# EAGLE board PCB_Bspd_NF (EAGLE 9.6.2)
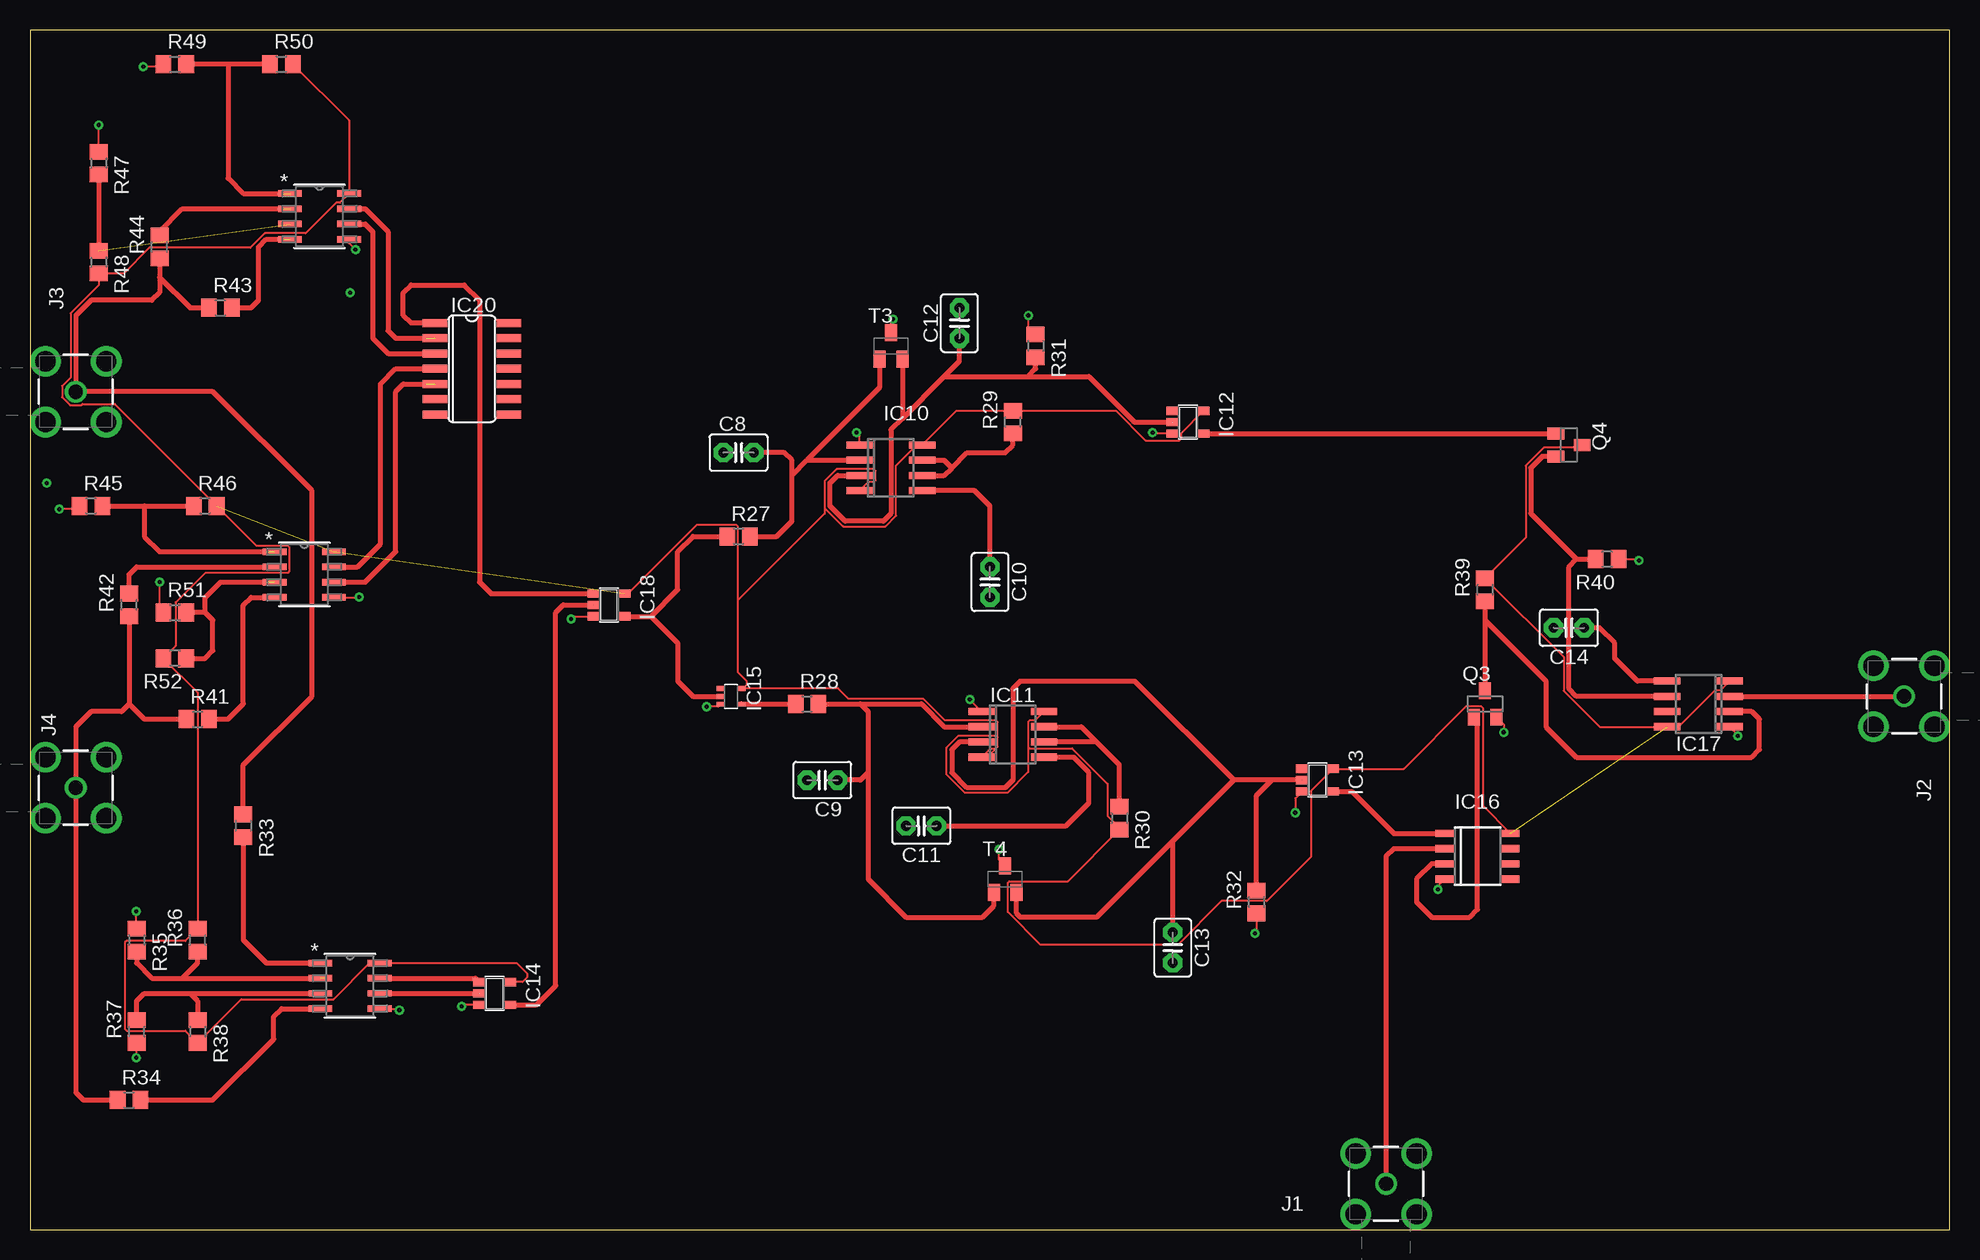
[diagram p0: board, top side]
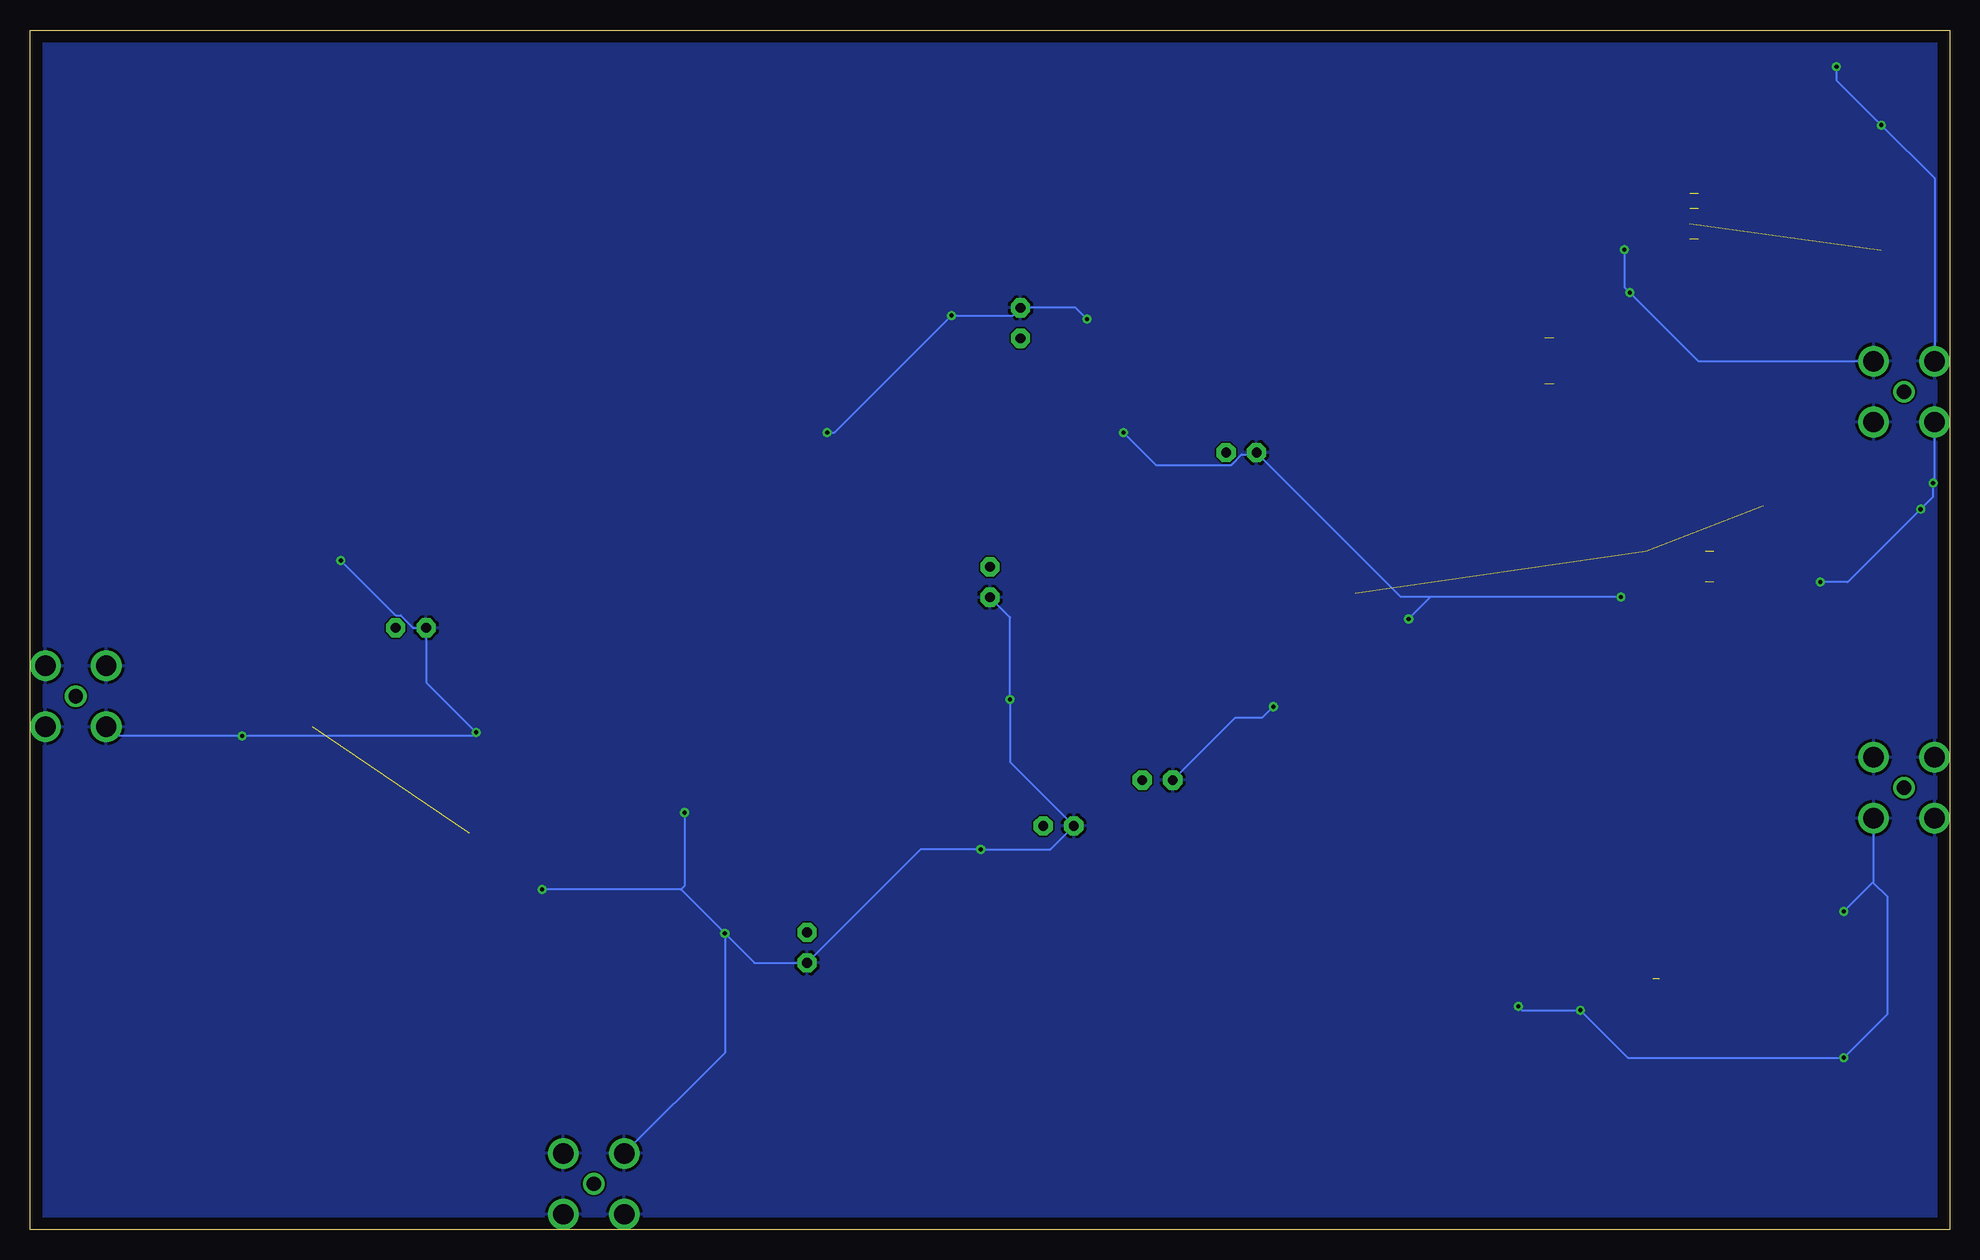
[diagram p1: board, bottom side, seen from below]

Size 160 x 100 mm. Coordinates in mm from the lower left corner, seen from the top.
Outline: 0,0 160,0 160,100 0,100 0,0
Copper layers (1*16): Top 0.035mm / dielectric 1.5mm / Bottom 0.035mm
Design rules "default": minimum track width 6mil, minimum drill 0.35mm, track to track 6mil, track to pad 6mil, pad to pad 6mil, via to via 6mil, smd to smd 6mil, copper to edge 40mil, drill to drill 6mil, minimum pad ring 10mil, minimum via ring 8mil, stop-mask expansion 4mil, vias tented up to drill 0mil, thermal gap 10mil

## Footprints (pad centres in the part's own frame; a part is rotated, then mirrored left to right if it is on the bottom)
C2.5-3 = drill 0.813 pad 1.6 octagon: 1 -1.27,0; 2 1.27,0
SO08 = smd 0.6 x 2.2: 1 -1.905,-2.6; 2 -0.635,-2.6; 3 0.635,-2.6; 4 1.905,-2.6; 5 1.905,2.6; 6 0.635,2.6; 7 -0.635,2.6; 8 -1.905,2.6
SOT23-5 = smd 0.69 x 0.99: 1 -0.95,-1.29; 2 0,-1.29; 3 0.95,-1.29; 4 0.95,1.3; 5 -0.95,1.3
SC70-5 = smd 0.4 x 0.7: 1 -0.65,-0.85; 2 0,-0.85; 3 0.65,-0.85; 4 0.65,0.85; 5 -0.65,0.85
D_R-PDSO-G8 = smd 0.6 x 1.5: 1 -1.905,-2.75; 2 -0.635,-2.75; 3 0.635,-2.75; 4 1.905,-2.75; 5 1.905,2.75; 6 0.635,2.75; 7 -0.635,2.75; 8 -1.905,2.75
SO14 = smd 0.66 x 2.032: 1 -3.81,-3.073; 2 -2.54,-3.073; 3 -1.27,-3.073; 4 0,-3.073; 5 1.27,-3.073; 6 2.54,-3.073; 7 3.81,-3.073; 8 3.81,3.073; 9 2.54,3.073; 10 1.27,3.073; 11 0,3.073; 12 -1.27,3.073; 13 -2.54,3.073; 14 -3.81,3.073
60613003121501 = drill 1.2: 1 0,0 | drill 1.7: 2 -2.54,2.54; 3 2.54,2.54; 4 2.54,-2.54; 5 -2.54,-2.54
SOT23 = smd 1 x 1.4: 1 -0.95,-1.1; 2 0.95,-1.1; 3 0,1.1
R0805 = smd 1.3 x 1.5: 1 -0.95,0; 2 0.95,0
SOT23-BEC = smd 1 x 1.4: B -0.95,-1.1; C 0,1.1; E 0.95,-1.1
SO-8_S = smd 1.981 x 0.533: 1 -2.464,1.905; 2 -2.464,0.635; 3 -2.464,-0.635; 4 -2.464,-1.905; 5 2.464,-1.905; 6 2.464,-0.635; 7 2.464,0.635; 8 2.464,1.905

## Placement (x,y rotation side)
C8  [C2.5-3]  59.05,64.77 0 top
C9  [C2.5-3]  66.04,37.47 180 top
C10  [C2.5-3]  80.01,53.98 270 top
C11  [C2.5-3]  74.3,33.66 180 top
C12  [C2.5-3]  77.47,75.56 90 top
C13  [C2.5-3]  95.25,23.5 270 top
C14  [C2.5-3]  128.27,50.16 180 top
IC10  NE555D  [SO08]  71.75,63.5 270 top
IC11  NE555D  [SO08]  81.92,41.27 270 top
IC12  74AUC1G06DBV  [SOT23-5]  96.52,67.31 270 top
IC13  74AUC1G06DBV  [SOT23-5]  107.31,37.47 270 top
IC14  74AHC1G08DBV  [SOT23-5]  38.73,19.68 270 top
IC15  74AHC1G04DCK  [SC70-5]  58.42,44.45 270 top
IC16  SN75453BD  [D_R-PDSO-G8]  120.65,31.11 270 top
IC17  NE555D  [SO08]  139.06,43.81 90 top
IC18  74AHC1G32DBV  [SOT23-5]  48.26,52.07 270 top
IC20  4072D  [SO14]  36.83,71.75 270 top
J1  60613003121501  [60613003121501]  113.03,3.81 180 top
J2  60613003121501  [60613003121501]  156.21,44.45 270 top
J3  60613003121501  [60613003121501]  3.81,69.85 90 top
J4  60613003121501  [60613003121501]  3.81,36.83 90 top
Q3  BSS123  [SOT23]  121.28,43.81 0 top
Q4  BSS123  [SOT23]  128.27,65.41 270 top
R27  [R0805]  59.05,57.78 0 top
R28  [R0805]  64.77,43.81 0 top
R29  [R0805]  81.92,67.31 90 top
R30  [R0805]  90.81,34.29 270 top
R31  [R0805]  83.82,73.66 270 top
R32  [R0805]  102.23,27.3 90 top
R33  [R0805]  17.78,33.66 270 top
R34  [R0805]  8.26,10.79 0 top
R35  [R0805]  8.89,24.13 270 top
R36  [R0805]  13.97,24.13 90 top
R37  [R0805]  8.89,16.51 90 top
R38  [R0805]  13.97,16.51 270 top
R39  [R0805]  121.28,53.34 90 top
R40  [R0805]  131.44,55.88 180 top
R41  [R0805]  13.97,42.55 0 top
R42  [R0805]  8.26,52.07 90 top
R43  [R0805]  15.88,76.83 0 top
R44  [R0805]  10.79,81.92 90 top
R45  [R0805]  5.08,60.33 0 top
R46  [R0805]  14.61,60.33 0 top
R47  [R0805]  5.71,88.9 270 top
R48  [R0805]  5.71,80.64 270 top
R49  [R0805]  12.06,97.16 0 top
R50  [R0805]  20.95,97.16 0 top
R51  [R0805]  12.06,51.44 0 top
R52  [R0805]  12.06,47.62 180 top
T3  [SOT23-BEC]  71.75,73.66 0 top
T4  [SOT23-BEC]  81.28,29.21 0 top
U4  LT1720CS8#PBF  [SO-8_S]  26.67,20.32 0 top
U5  LT1720CS8#PBF  [SO-8_S]  22.86,54.61 0 top
U6  LT1720CS8#PBF  [SO-8_S]  24.13,84.45 0 top

## Library data of the parts
C8-C14 = capacitor-wima
IC10 IC11 IC17 = linear
IC12-IC15 = 74xx-little-de
IC16 = texas-sn55-sn75
IC18 = 74xx-little-us
IC20 = 40xx
J1-J4 = 60613003121501; AVAILABILITY: In Stock; CHECK_PRICES: https://www.snapeda.com/parts/60613003121501/Wurth+Elektronik/view-part/?ref=eda; DESCRIPTION: Right Angle_Solder Length 3.94mm; MF: Wurth Elektronik; MP: 60613003121501; PACKAGE: None; PRICE: None; SNAPEDA_LINK: https://www.snapeda.com/parts/60613003121501/Wurth+Elektronik/view-part/?ref=snap
Q3 Q4 = transistor-small-signal
R27-R52 = rcl; SPICEPREFIX: R
T3 T4 = transistor
U4-U6 = LT1720CS8_PBF; AVAILABILITY: In Stock; CHECK_PRICES: https://www.snapeda.com/parts/LT1720CS8%23PBF/Analog+Devices/view-part/?ref=eda; DESCRIPTION: LT1720 - Dual, 4.5ns, Single Supply 3V/5V Comparators with Rail-to-Rail Outputs; MF: Analog Devices; MP: LT1720CS8#PBF; PACKAGE: SO-8 Linear Technology; PRICE: None; SNAPEDA_LINK: https://www.snapeda.com/parts/LT1720CS8%23PBF/Analog+Devices/view-part/?ref=snap

## Nets
GND: C8.1 C9.2 C10.2 C11.2 C12.2 C13.2 C14.2 IC10.1 IC11.1 IC12.3 IC13.3 IC14.3 IC15.3 IC16.4 IC17.1 IC18.3 J1.2 J1.3 J1.4 J1.5 J2.2 J2.3 J2.4 J2.5 J3.2 J3.3 J3.4 J3.5 J4.2 J4.3 J4.4 J4.5 Q3.2 R31.1 R32.1 R35.1 R37.1 R40.1 R45.1 R47.1 R49.1 R51.1 T3.C T4.C U4.5 U5.5 U6.5
N$41: IC13.4 IC16.1
N$42: IC16.3 Q3.1
N$43: C10.1 IC10.5
N$44: C11.1 IC11.5
N$45: IC10.6 IC10.7 R29.1
N$46: IC11.6 IC11.7 R30.1
N$47: C12.1 IC10.3 IC12.2 R31.2 T3.E
N$48: C13.1 IC11.3 IC13.2 R32.2 T4.E
N$49: R34.2 U4.4
N$50: R37.2 R38.1 U4.3
N$51: R35.2 R36.1 U4.2
N$52: R33.2 U4.1
N$53: IC20.2 U6.7
N$54: IC20.3 U6.6
N$55: IC17.6 Q4.2 R40.2
N$56: IC16.2 J1.1
N$57: IC17.2 Q3.3 R39.1
N$58: IC17.3 J2.1
N$59: C14.1 IC17.5
N$60: IC12.4 Q4.1
N$61: J4.1 R34.1 R41.1 R42.1
N$64: J3.1 R33.1 R43.1 R44.1
N$65: R43.2 U6.4
N$66: R41.2 U5.4
N$67: R44.2 U6.2
N$68: R42.2 U5.2
N$69: R47.2 R48.1 U6.3
N$70: R49.2 R50.1 U6.1
N$71: R45.2 R46.1 U5.1
N$72: IC20.4 U5.7
N$73: IC20.5 U5.6
N$74: IC14.1 U4.7
N$75: IC14.2 U4.6
N$76: IC18.1 IC20.1
N$77: IC14.4 IC18.2
N$78: IC15.2 IC18.4 R27.1
N$79: IC15.4 R28.1
N$80: C8.2 IC10.2 R27.2 T3.B
N$81: C9.1 IC11.2 R28.2 T4.B
N$82: R51.2 R52.1 U5.3
VCC: IC10.4 IC10.8 IC11.4 IC11.8 IC12.5 IC13.5 IC14.5 IC15.5 IC16.8 IC17.4 IC17.8 IC18.5 Q4.3 R29.2 R30.2 R36.2 R38.2 R39.2 R46.2 R48.2 R50.2 R52.2 U4.8 U5.8 U6.8
VDD: IC20.14
VSS: IC20.7

## Tracks (layer width: path | path; a pad name or v marks a point on that pad's centre or on a via)
GND  (via drill 0.35)
  Top 0.152: R35.1 8.84,25.13 v8.84,26.52 | R37.1 8.84,15.51 v8.84,14.33 | U4.5 30.66,18.41 v30.79,18.29 | IC14.3 36.11,18.73 v35.97,18.59 | R51.1 10.79,51.76 v10.79,53.98 | R45.1 3.85,60.05 v2.44,60.05 | R49.1 10.89,96.93 v9.45,96.93 | R47.1 v5.71,92.08 | U5.5 27.41,52.7 v27.43,52.73 | IC18.3 45.33,51.12 v45.11,50.9 | IC15.3 57.36,43.59 v56.39,43.59 | IC10.1 69.16,66.18 v68.89,66.45 | T3.C 71.75,75.72 v71.93,75.89 | R31.1 83.21,75.22 v83.21,76.2 | IC12.3 93.66,66.36 v93.57,66.45 | R40.1 134.01,55.88 v134.11,55.78 | IC17.1 142.34,41.23 v142.34,41.15 | Q3.2 122.83,42.12 v122.83,41.45 | IC16.4 117.35,28.66 v117.35,28.35 | R32.1 102.23,24.82 v102.11,24.69 | IC13.3 105.46,35.95 v105.46,34.75 | U6.5 26.59,82.22 v27.13,81.69 | IC11.1 78.33,44.16 v78.33,44.2 | T4.C 80.77,30.82 v80.77,31.7
  Bottom 0.152: v8.84,26.52 6.4,28.96 | 6.4,28.96 6.35,29.01 J4.5 | 6.4,28.96 5.18,27.74 5.18,17.98 v8.84,14.33 26.82,14.33 v30.79,18.29 35.66,18.29 v35.97,18.59 | v10.79,53.98 8.51,53.98 v2.44,60.05 1.39,61.09 v1.39,62.23 1.27,62.35 J3.2 | v9.45,96.93 9.45,95.81 v5.71,92.08 1.27,87.63 J3.3 | v27.43,52.73 43.28,52.73 | 43.28,52.73 45.74,52.73 57.62,64.61 | 57.62,64.61 C8.1 | v45.11,50.9 43.28,52.73 | v56.39,43.59 57.3,42.67 59.56,42.67 C9.2 | 57.62,64.61 59.03,64.61 59.9,63.74 66.18,63.74 v68.89,66.45 | v71.93,75.89 72.87,76.83 C12.2 78.11,76.2 v83.21,76.2 92.96,66.45 v93.57,66.45 | v134.11,55.78 129.53,51.19 129.11,51.19 128.09,50.16 C14.2 127,45.62 v122.83,41.45 123.14,41.15 v142.34,41.15 152.91,41.15 J2.4 | v102.11,24.69 99.64,22.23 C13.2 85.78,31.7 v80.77,31.7 74.98,31.7 C11.2 78.33,38.96 v78.33,44.2 78.33,51.03 C10.2 | v102.11,24.69 105.77,28.35 | 105.77,28.35 v117.35,28.35 | v105.46,34.75 105.46,28.65 105.77,28.35 | v27.13,81.69 27.13,78.56 v26.67,78.11 20.95,72.39 J3.4 | v102.11,24.69 102.11,14.73 J1.4
  pour Bottom: 0,99.69 0,0 160.02,0 160.02,100.33 0,100.33
  pour Bottom: 0,99.97 0,0 160.02,0 160.02,99.97
N$41
  Top 0.406: IC13.4 110.17,36.52 113.67,33.02 IC16.1
N$42
  Top 0.406: IC16.3 116.84,30.48 115.57,29.21 115.57,27.3 116.84,26.04 120.02,26.04 120.65,26.67 120.65,42.4 Q3.1
N$43
  Top 0.406: C10.1 80.01,60.33 78.74,61.59 IC10.5
N$44
  Top 0.406: C11.1 86.36,33.66 88.27,35.56 88.27,38.1 87,39.37 IC11.5
N$45
  Top 0.406: IC10.6 76.2,62.87 76.83,63.5 | IC10.7 76.2,64.14 76.83,63.5 | 76.83,63.5 78.11,64.77 81.28,64.77 81.92,65.41 R29.1
N$46
  Top 0.406: R30.1 90.81,38.73 88.9,40.64 | 88.9,40.64 IC11.6 | IC11.7 87.63,41.91 88.9,40.64
N$47
  Top 0.406: T3.E 72.7,67.62 | 72.7,67.62 71.75,66.67 71.75,59.69 71.12,59.05 67.94,59.05 66.67,60.33 66.67,62.23 67.31,62.87 IC10.3 | C12.1 77.47,72.39 76.2,71.12 | 72.7,67.62 76.2,71.12 | 76.2,71.12 83.19,71.12 | 83.19,71.12 83.82,71.75 R31.2 | 83.19,71.12 88.27,71.12 92.08,67.31 IC12.2
N$48
  Top 0.406: 100.33,37.47 95.25,32.38 | 95.25,32.38 88.9,26.04 82.55,26.04 82.23,26.36 T4.E | IC13.2 103.5,37.47 | 103.5,37.47 100.33,37.47 | IC11.3 77.47,40.64 76.83,40.01 76.83,38.1 78.11,36.83 81.28,36.83 81.92,37.47 81.92,45.09 82.55,45.72 92.08,45.72 100.33,37.47 | C13.1 95.25,32.38 | R32.2 102.23,36.2 103.5,37.47
N$49
  Top 0.406: R34.2 15.24,10.79 20.32,15.88 20.32,17.78 20.95,18.41 U4.4
N$50
  Top 0.406: R37.2 8.89,19.05 9.53,19.68 13.34,19.68 | 13.34,19.68 13.97,19.05 R38.1 | 13.34,19.68 U4.3
N$51  (1 unrouted)
  Top 0.406: 13.65,23.18 R36.1 13.97,22.23 12.7,20.95 | R35.2 8.89,22.23 10.16,20.95 12.7,20.95 | 12.7,20.95 24.77,20.95
N$52
  Top 0.406: U4.1 19.68,22.23 17.78,24.13 R33.2
N$53  (1 unrouted)
  Top 0.406: U6.7 27.94,85.09 29.84,83.19 29.84,74.93 30.48,74.3 33.02,74.3
N$54
  Top 0.406: U6.6 27.94,83.82 28.57,83.19 28.57,74.3 29.84,73.03 IC20.3
N$55
  Top 0.406: Q4.2 126.05,64.45 125.09,63.5 125.09,59.69 128.91,55.88 | IC17.6 128.91,44.45 128.27,45.09 128.27,55.24 128.91,55.88 | 128.91,55.88 R40.2
N$56
  Top 0.406: IC16.2 113.67,31.75 113.03,31.11 J1.1
N$57
  Top 0.406: R39.1 121.28,50.8 | 121.28,50.8 Q3.3 | IC17.2 143.51,43.18 144.15,42.55 144.15,40.01 143.51,39.37 128.91,39.37 126.36,41.91 126.36,45.72 121.28,50.8
N$58
  Top 0.406: IC17.3 J2.1
N$59
  Top 0.406: IC17.5 133.99,45.72 132.08,47.62 132.08,48.9 130.81,50.16 C14.1
N$60
  Top 0.406: IC12.4 Q4.1
N$61
  Top 0.406: R42.1 8.26,43.81 | 8.26,43.81 9.53,42.55 R41.1 | 8.26,43.81 7.62,43.18 5.08,43.18 3.81,41.91 J4.1 3.81,11.43 4.45,10.79 R34.1
N$64
  Top 0.406: R44.1 10.79,79.38 | 10.79,79.38 13.34,76.83 R43.1 | 10.79,79.38 10.79,78.11 10.16,77.47 5.08,77.47 3.81,76.2 J3.1 15.24,69.85 23.5,61.59 23.5,44.45 17.78,38.73 R33.1
N$65  (1 unrouted)
  Top 0.406: R43.2 18.41,76.83 19.05,77.47 19.05,81.92 19.68,82.55 20.95,82.55
N$66
  Top 0.406: R41.2 16.51,42.55 17.78,43.81 17.78,52.07 18.41,52.7 U5.4
N$67  (1 unrouted)
  Top 0.406: R44.2 10.79,83.19 12.7,85.09 20.95,85.09
N$68
  Top 0.406: R42.2 8.26,54.61 8.89,55.24 U5.2
N$69  (1 unrouted)
  Top 0.406: 6.04,88.27 R47.2 R48.1
N$70  (1 unrouted)
  Top 0.406: R50.1 16.51,97.16 | 16.51,97.16 R49.2 | 16.51,97.16 16.51,87.63 17.78,86.36 20.95,86.36
N$71  (1 unrouted)
  Top 0.406: R45.2 9.53,60.33 | 9.53,60.33 R46.1 | 9.53,60.33 9.53,57.78 10.79,56.52 19.68,56.52
N$72
  Top 0.406: U5.7 27.3,55.24 29.21,57.15 29.21,70.48 30.48,71.75 IC20.4
N$73  (1 unrouted)
  Top 0.406: U5.6 27.94,53.98 30.48,56.52 30.48,69.85 31.11,70.48 33.02,70.48
N$74
  Top 0.406: IC14.1 37.12,20.95 U4.7
N$75
  Top 0.406: U4.6 IC14.2
N$76
  Top 0.406: IC20.1 31.75,75.56 31.11,76.2 31.11,78.11 31.75,78.74 36.2,78.74 37.47,77.47 37.47,53.98 38.42,53.02 IC18.1
N$77
  Top 0.406: IC14.4 42.23,18.73 43.81,20.32 43.81,51.44 44.45,52.07 IC18.2
N$78
  Top 0.406: IC15.2 55.24,44.45 53.98,45.72 53.98,48.9 51.75,51.12 | IC18.4 51.75,51.12 | 51.75,51.12 53.98,53.34 53.98,56.52 55.24,57.78 R27.1
N$79
  Top 0.406: IC15.4 59.28,43.81 R28.1
N$80
  Top 0.406: R27.2 62.23,57.78 63.5,59.05 63.5,62.87 | 63.5,62.87 63.5,64.14 62.87,64.77 C8.2 | 63.5,62.87 64.77,64.14 | 64.77,64.14 IC10.2 | T3.B 70.81,70.17 64.77,64.14
N$81
  Top 0.406: R28.2 69.22,43.81 | 69.22,43.81 74.3,43.81 76.2,41.91 IC11.2 | 69.22,43.81 69.85,43.18 69.85,38.1 | 69.85,38.1 69.22,37.47 C9.1 | 69.85,38.1 69.85,29.21 73.03,26.04 79.38,26.04 80.33,26.99 T4.B
N$82  (1 unrouted)
  Top 0.406: R52.1 14.61,47.62 15.24,48.26 15.24,50.8 14.61,51.44 | 14.61,51.44 R51.2 | 14.61,51.44 14.61,52.7 15.88,53.98 19.68,53.98
VCC  (3 unrouted)
  Top 0.152: R50.2 26.59,92.47 U6.8 25.82,85.58 25.51,85.58 22.97,83.05 19.57,83.05 18.37,81.84 9.95,81.84 7.8,79.69 R48.2 5.71,78.72 3.38,76.38 3.38,71.01 2.68,70.32 2.68,69.38 3.34,68.72 4.28,68.72 4.37,68.81 7.07,68.81 R46.2 18.87,57.01 21.48,57.01 21.61,56.88 21.61,54.88 21.48,54.75 14.61,54.75 12.14,52.28 12.14,48.65 R52.2 13.97,44.77 R36.2 12.95,24.06 8.04,24.06 7.91,23.93 7.91,16.71 8.04,16.58 12.95,16.58 R38.2 17.6,19.19 25.29,19.19 28.33,22.23 U4.8 40.56,22.23 41.45,21.34 41.45,21.03 41.06,20.64 IC14.5 | IC18.5 49.87,53.02 55.61,58.76 58.85,58.76 58.98,58.63 58.98,52.43 | 58.98,52.43 58.98,46.48 59.74,45.72 59.74,45.41 59.44,45.11 | IC15.5 59.43,45.1 59.44,45.11 | 66.24,60.15 66.24,59.69 58.98,52.43 | IC10.4 69.9,62.34 70.35,62.34 70.48,62.47 70.48,63.26 70.35,63.39 67.23,63.39 66.24,62.41 66.24,60.15 | 66.24,60.15 67.77,58.62 71.3,58.62 72.19,59.51 72.19,63.69 73.9,65.41 IC10.8 77.21,68.26 R29.2 90.51,68.26 92.99,65.79 95.82,65.79 95.95,65.92 95.95,66.39 IC12.5 | Q4.3 129.15,65.18 126.17,65.18 124.66,63.68 124.66,57.67 R39.2 127.84,47.74 127.84,44.91 130.83,41.91 IC17.8 137.4,41.91 140.47,44.98 140.92,44.98 IC17.4 | IC16.8 121.08,35.34 121.08,43.49 120.93,43.64 119.74,43.64 114.51,38.41 IC13.5 106.75,36.55 106.75,31.05 103.08,27.38 99.32,27.38 95.68,23.74 84.24,23.74 81.5,26.47 81.5,28.91 81.64,29.04 86.5,29.04 90.76,33.29 | 90.76,33.29 R30.2 | 83.19,40.24 83.32,40.11 86.86,40.11 89.83,37.15 89.83,34.49 90.76,33.56 90.76,33.29 | 83.19,40.24 83.19,42.3 83.32,42.44 83.77,42.44 IC11.8 | 80.64,41.03 80.51,41.17 77.39,41.17 76.4,40.18 76.4,37.92 77.93,36.4 81.46,36.4 83.19,38.13 83.19,40.24
  Top 0.152: 80.51,40.11 79.77,39.37 IC11.4 80.06,40.11 80.51,40.11 | 80.51,40.11 80.64,40.24 80.64,41.03 | 80.64,41.03 80.64,42.3 80.51,42.44 76.28,42.44 74.47,44.25 68.22,44.25 67.36,45.11 59.44,45.11